# EAGLE board power (EAGLE 9.5.1)
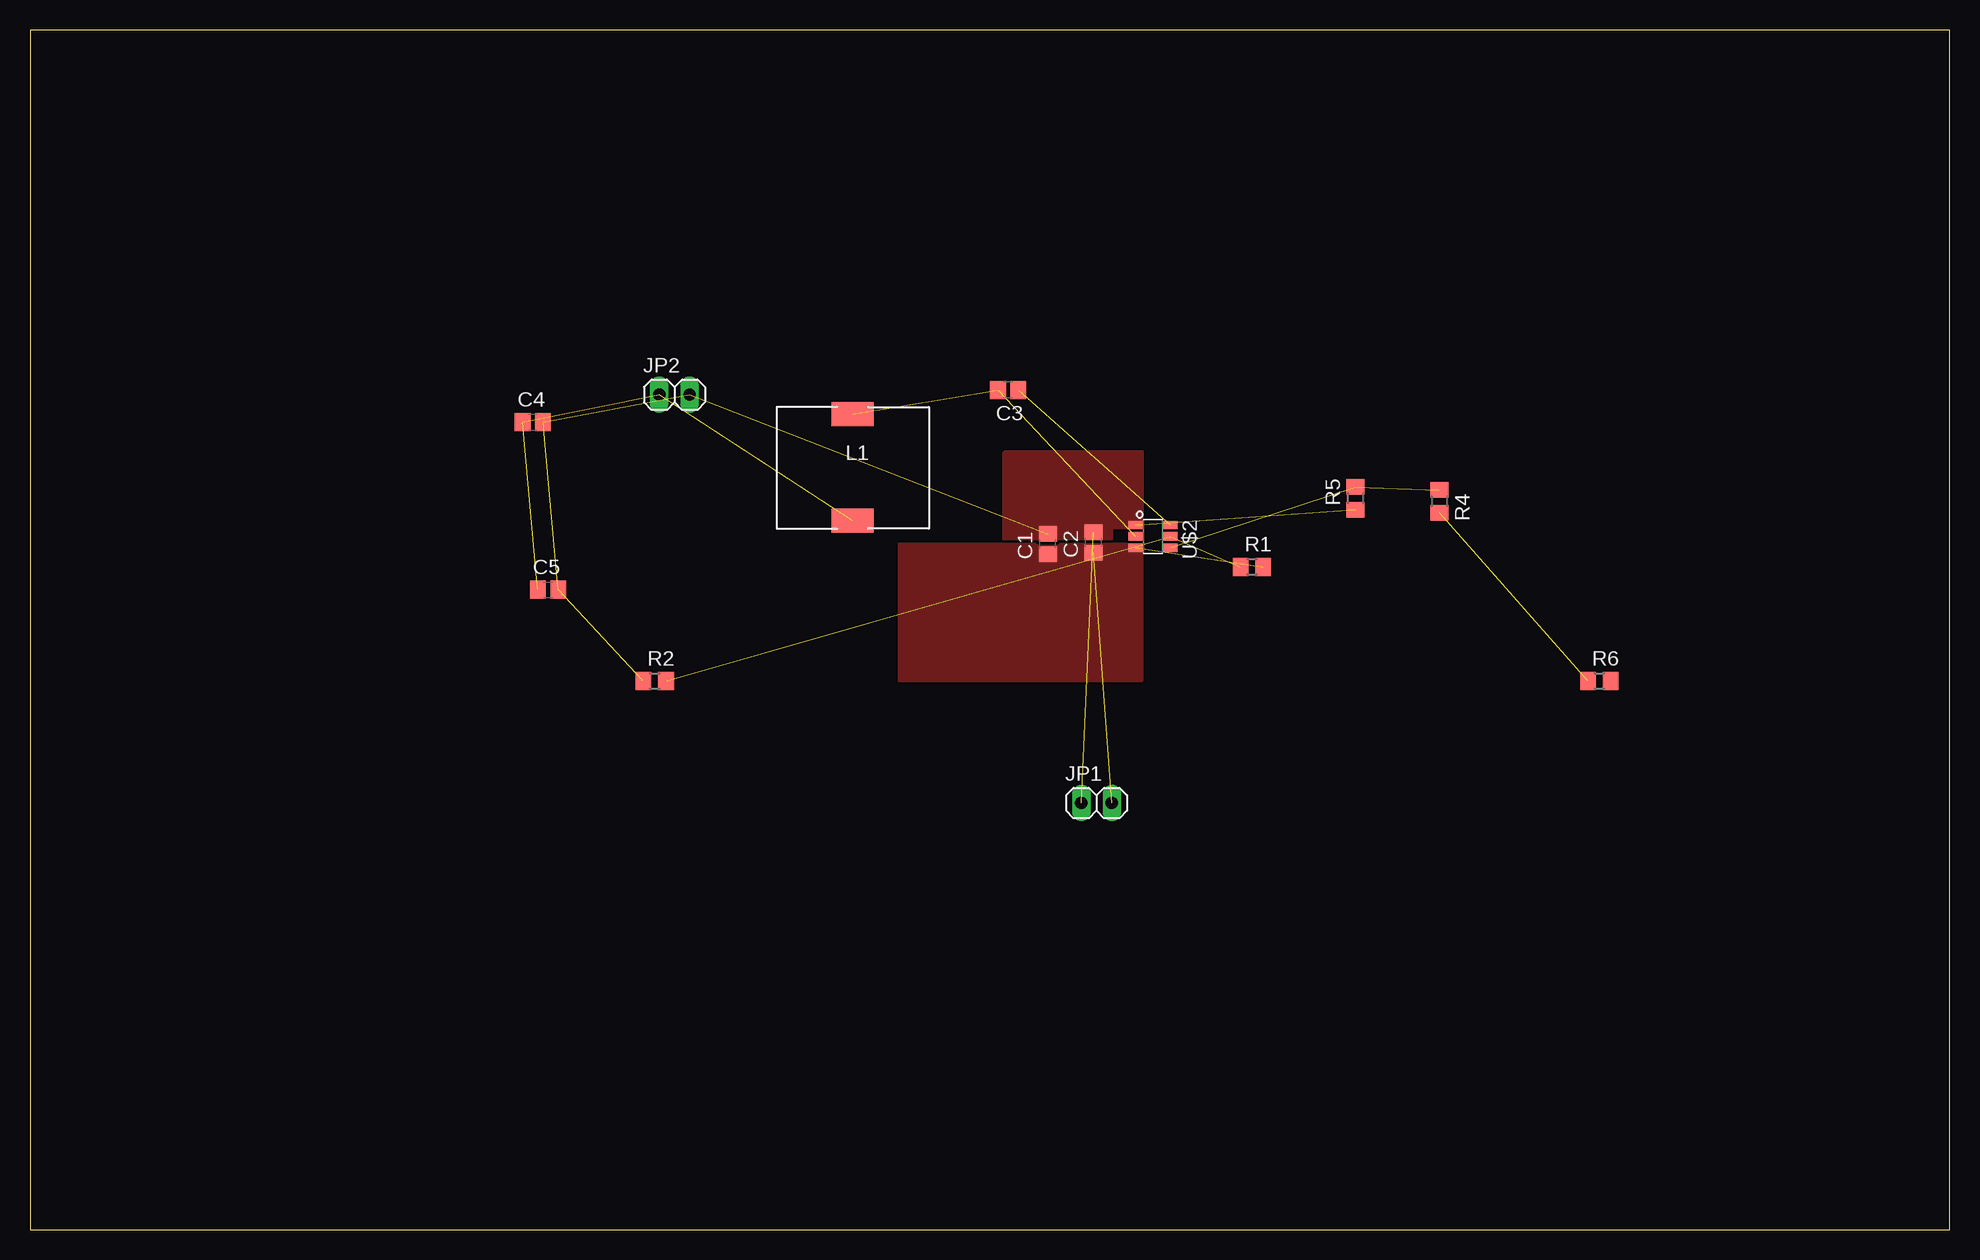
[diagram p0: board, top side]

Size 160 x 100 mm. Coordinates in mm from the lower left corner, seen from the top.
Outline: 0,0 160,0 160,100 0,100 0,0
Copper layers (1*16): Top 0.035mm / dielectric 1.5mm / Bottom 0.035mm
Design rules "default": minimum track width 6mil, minimum drill 0.35mm, track to track 6mil, track to pad 6mil, pad to pad 6mil, via to via 6mil, smd to smd 6mil, copper to edge 40mil, drill to drill 6mil, minimum pad ring 10mil, minimum via ring 8mil, stop-mask expansion 4mil, vias tented up to drill 0mil, thermal gap 10mil

## Footprints (pad centres in the part's own frame; a part is rotated, then mirrored left to right if it is on the bottom)
C2012 = smd 1.3 x 1.5: 1 -0.85,0; 2 0.85,0
1X02 = drill 1.016 long: 1 -1.27,0; 2 1.27,0
7447714100 = smd 3.5 x 2: P$1 0,4.5; P$2 0,-4.39
R0805 = smd 1.3 x 1.5: 1 -0.95,0; 2 0.95,0
SOT-23-6 = smd 0.69 x 1.2: 1 -0.95,-1.44; 2 0,-1.44; 3 0.95,-1.44; 4 0.95,1.45; 5 0,1.45; 6 -0.95,1.45

## Placement (x,y rotation side)
C1  10uF  [C2012]  84.84,57.15 90 top
C2  0.1uF  [C2012]  88.65,57.28 90 top
C3  0.1uF  [C2012]  81.53,69.98 180 top
C4  22uF  [C2012]  41.91,67.31 0 top
C5  22uF  [C2012]  43.18,53.34 0 top
JP1  [1X02]  88.9,35.56 0 top
JP2  [1X02]  53.72,69.6 0 top
L1  7447714100  [7447714100]  68.58,63.5 0 top
R1  511k  [R0805]  101.85,55.24 0 top
R2  105k  [R0805]  52.07,45.72 0 top
R4  100k  [R0805]  117.47,60.71 270 top
R5  22.1k  [R0805]  110.49,60.96 90 top
R6  2k  [R0805]  130.81,45.72 0 top
U$2  TPS54308  [SOT-23-6]  93.6,57.78 270 top

## Library data of the parts
C1-C5 = rcl; SPICEPREFIX: C
JP1 JP2 = pinhead
L1 = chava
R1 R2 R4-R6 = rcl; SPICEPREFIX: R
U$2 = Spaceshot_Custom

## Nets
+12V: C1.1 C2.1 JP1.2 R1.2 U$2.3
GND: C1.2 C2.2 C4.2 C5.2 JP1.1 JP2.2 R2.1 R5.1 U$2.1
N$1: R1.1 R2.2 U$2.5
N$2: C3.1 U$2.6
N$3: C3.2 L1.P$1 U$2.2
N$4: C4.1 C5.1 JP2.1 L1.P$2
N$5: R4.2 R6.1
N$7: R6.2
N$8: R4.1 R5.2 U$2.4

## Tracks (layer width: path | path; a pad name or v marks a point on that pad's centre or on a via)
+12V  (2 unrouted)
  pour Top (isolate 0.254, no thermals): 92.71,57.15 72.39,57.15 72.39,45.72 92.71,45.72
GND  (6 unrouted)
  pour Top (isolate 0.254, no thermals): 92.71,58.42 90.17,58.42 90.17,57.53 81.15,57.53 81.15,64.77 81.28,64.9 92.71,64.9
N$1  (2 unrouted)
N$2  (1 unrouted)
N$3  (2 unrouted)
N$4  (3 unrouted)
N$5  (1 unrouted)
N$8  (2 unrouted)